# Altium PCB 20K Control Board V1.1.PcbDoc (part 21 of 24)
Units mm, origin at the board's own origin, x right, y up, seen from the top; angles counter-clockwise.
Board outline 132 x 260 mm, 4 copper layers (Top Layer, GND, VCC, Bottom Layer); 1384 components, 779 nets, 4515 pads, 1774 vias.
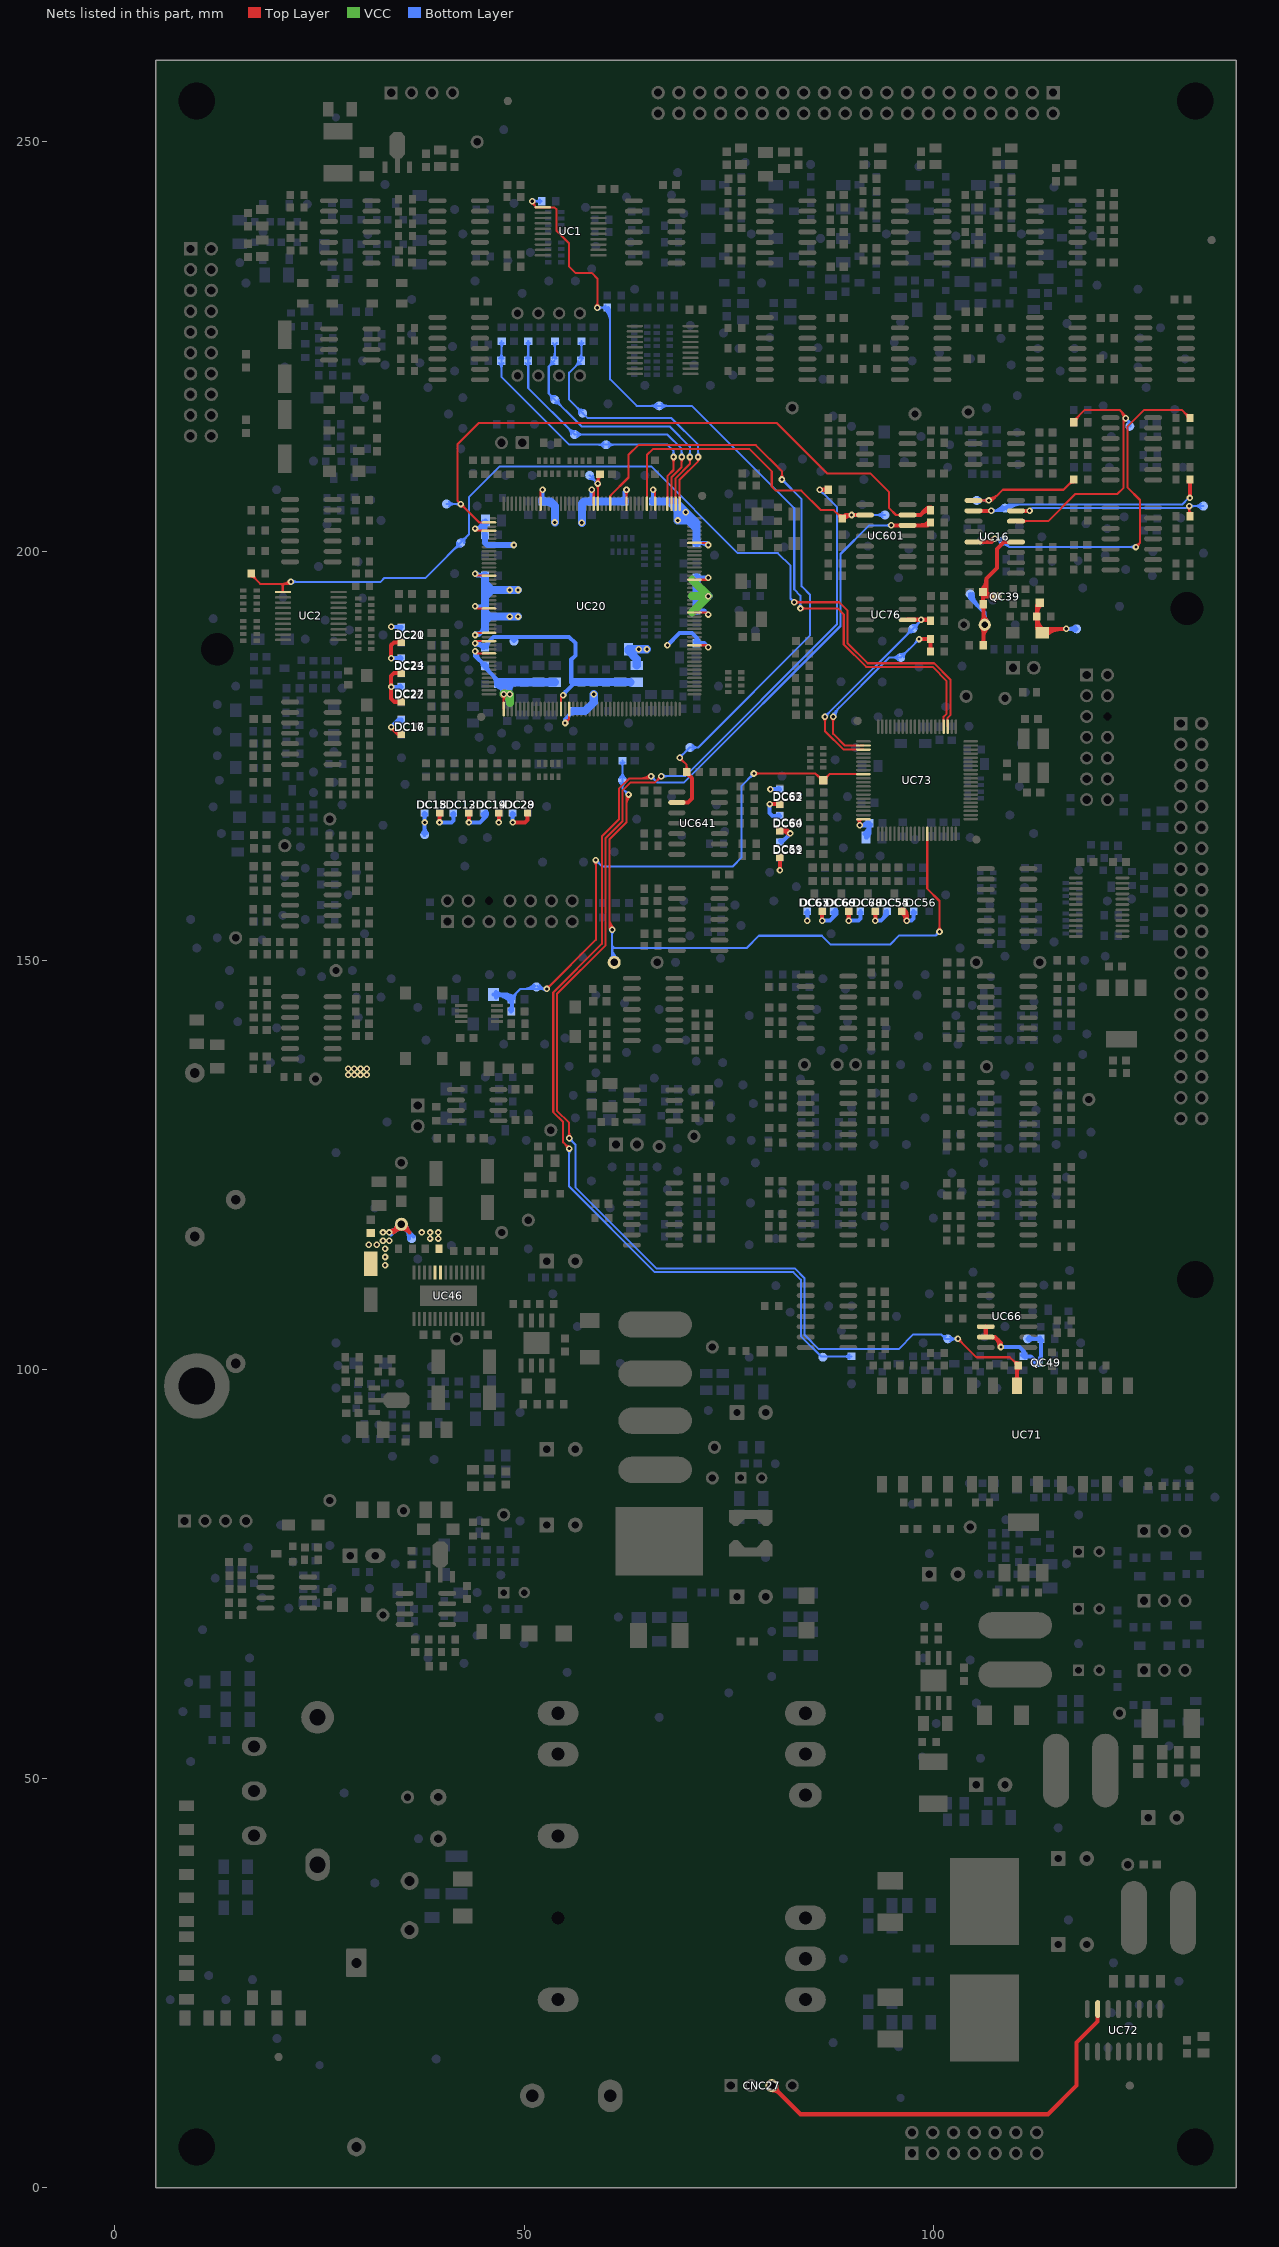
[diagram p23: the nets of this part, all layers, seen from the top]

## Via types
v1: diameter 0.8, hole 0.4, Top Layer to Bottom Layer, tented both sides, 1354 vias
v2: diameter 1.2, hole 0.7, Top Layer to Bottom Layer, 261 vias
v3: diameter 0.8, hole 0.4, Top Layer to Bottom Layer, 58 vias
v4: diameter 1.2, hole 0.7, Top Layer to Bottom Layer, tented top, 58 vias
v5: diameter 0.8, hole 0.4, Top Layer to Bottom Layer, tented top, 22 vias
v6: diameter 1.2, hole 0.7, Top Layer to Bottom Layer, tented both sides, 13 vias
v7: diameter 1.2, hole 0.7, Top Layer to Bottom Layer, tented bottom, 8 vias

## Nets (pads, with @x,y where several pads share a name; then routed paths per layer and width w, separated by ;. In a path a pad name is that pad's centre, name@x,y a point inside that pad or via, vN(x,y) a via of type N, cw(c..) or ccw(c..) an arc to the next point about the centre after c; other vN are vias at no path point) (continued)
S.X\R\S\: CC169.2 CC439.1 DC26.1 pad.ICT@51.5,146.75 RC269.1 UC73.9 | length 92.5
  Top Layer w0.25: v1(52.75,146.5) 58.75,152.5 v1(58.75,162.25) ; v1@52.75,146.775 ccw(c52.75,147.439) 53.219,146.969 ccw(c53.689,146.5) v1@53.025,146.5 ; v1@58.556,162.056 cw(c58.086,161.586) 58.75,161.586 cw(c59.414,161.586) v1@58.944,162.056 ; v1(78.075,172.825) 85.585,172.825 86.41,172 CC439.1@86.55,172 87.3,172.75 UC73.9@91.45,172.75 ; v1@78.269,172.631 cw(c78.739,172.161) 78.739,172.825 cw(c78.739,173.489) v1@78.269,173.019 ; 85.67,172.739 ccw(c86.55,173.619) 86.55,172.375 ccw(c86.55,173.28) 87.19,172.64 ccw(c87.83,172) CC439.1@86.925,172 ; 86.009,172.401 cw(c85.609,172) CC439.1@86.175,172 ; CC439.1@86.097,172.313 ccw(c86.55,172.766) CC439.1@86.55,172.125
  Bottom Layer w0.25: CC169.2@48.45,145.625 ccw(c48.45,146.047) CC169.2@48.749,145.749 ; CC169.2@48.5,145.25 48.5,145.5 49.5,146.5 v1(52.75,146.5) cw(c52.75,147.57) pad.ICT@51.855,146.983 ; CC169.2@48.575,145.25 cw(c49.36,145.25) 48.805,145.805 ; CC169.2@48.825,145.25 cw(c50.213,145.25) 49.232,146.232 ; 49.87,146.5 ccw(c49.87,148.38) pad.ICT@51.199,147.051 ; 50.474,146.5 ccw(c50.474,147.776) pad.ICT@51.376,146.874 ; pad.ICT@51.646,146.846 ccw(c52.287,147.266) 52.287,146.5 ; v1@52.556,146.306 ccw(c52.086,145.836) 52.086,146.5 ccw(c52.086,147.164) v1@52.556,146.694 ; v1@58.75,161.975 cw(c58.75,161.311) 59.219,161.781 cw(c59.689,162.25) v1@59.025,162.25 ; v1(58.75,162.25) 59.55,161.45 75.45,161.45 76.575,162.575 76.575,171.325 v1(78.075,172.825) ; v1@77.8,172.825 cw(c77.136,172.825) 77.606,172.356 cw(c78.075,171.886) v1@78.075,172.55
  Bottom Layer w0.5: DC26.1@46.25,145.8 47.9,145.8 48.5,145.2 RC269.1@48.5,143.85 ; DC26.1@46.519,145.8 cw(c46.519,143.319) 48.273,145.073 cw(c47.726,144.526) 48.5,144.526 ; DC26.1@46.568,145.482 cw(c47.336,144.714) 47.336,145.8 cw(c47.336,146.886) DC26.1@46.568,146.118 ; 47.726,145.8 cw(c47.726,144.526) CC169.2@48.627,145.427 ; RC269.1@48.259,143.941 ccw(c47.676,144.524) 48.5,144.524 ; RC269.1@48.4,143.75 RC269.1@48.4,143.85
S_BOOST_OFF: pad.ICT@42.25,201 RC296.1 UC2.1 UC73.63 | length 128
  Top Layer w0.25: RC296.1@16.65,196.875 cw(c16.65,196.332) 17.034,196.716 ; RC296.1@16.65,197.25 16.65,197.1 17.75,196 20.5,196 ; RC296.1@16.975,197.2 ccw(c18.001,197.2) 17.276,196.474 ; UC2.1@19.75,195 UC2.1@21,195 ; 20.25,196 20.5,195.75 ; UC2.1@20.5,195.033 20.5,195.75 ; 20.75,196 20.5,195.75 ; 20.976,196 ccw(c20.976,196.611) v1@21.479,196.264 ; v1@21.274,196.406 cw(c20.5,196.94) 20.5,196 ; v1(21.5,196.25) 21.25,196 20.5,196 ; v1(83,193.75) 88.5,193.75 89.5,192.75 89.5,188.773 91.973,186.3 100.086,186.3 102.077,184.309 102.077,179.964 101.75,179.636 UC73.63@101.75,178.55 ; v1@83.194,193.556 cw(c83.664,193.086) 83.664,193.75 cw(c83.664,194.414) v1@83.194,193.944 ; 20.5,195.75 20.5,196
  Bottom Layer w0.25: v1(21.5,196.25) 32.452,196.25 32.933,196.731 37.956,196.731 43.25,202.025 43.25,206.6 47,210.35 65.514,210.35 76.114,199.75 81,199.75 82.55,198.2 82.55,194.2 ; v1@21.694,196.056 cw(c22.164,195.586) 22.164,196.25 cw(c22.164,196.914) v1@21.694,196.444 ; 41.481,200.257 cw(c42.25,199.488) pad.ICT@42.25,200.575 ; 41.542,200.318 ccw(c40.86,201) pad.ICT@41.825,201 ; pad.ICT@42.25,201.425 ccw(c42.25,202.39) 42.932,201.708 ; pad.ICT@42.675,201 cw(c43.762,201) 42.993,201.769 ; v1@82.725,193.758 ccw(c82.127,193.777) 82.55,194.2 ; v1@82.992,194.025 cw(c82.973,194.623) 82.55,194.2 ; v1(83,193.75) 82.55,194.2
S_INV_OFF: pad.ICT@66.5,217.75 RC290.1 RC314.2 UC1.1 UC73.64 | length 115.9
  Top Layer w0.25: v1(51,242.75) 51,242.5 51.496,242.004 UC1.1@52.279,242.004 53.696,242.004 53.95,241.75 53.95,239.138 55.5,237.588 55.5,234.75 56.25,234 58.25,234 58.94,233.31 v1(58.94,229.75) ; v1@51.257,242.653 ccw(c51.721,242.479) UC1.1@51.371,242.129 ; 51.339,242.161 cw(c51.182,242.004) UC1.1@51.404,242.004 ; v1@58.746,229.944 ccw(c58.276,230.414) 58.94,230.414 ccw(c59.604,230.414) v1@59.134,229.944 ; v1(83.75,193) 88.3,193 89.05,192.25 89.05,188.586 91.786,185.85 99.9,185.85 101.627,184.123 101.627,180.15 101.25,179.773 UC73.64@101.25,178.55 ; v1@83.944,192.806 cw(c84.414,192.336) 84.414,193 cw(c84.414,193.664) v1@83.944,193.194
  Bottom Layer w0.25: v1(51,242.75) RC290.1@52.121,242.75 ; v1@51.194,242.556 cw(c51.664,242.086) 51.664,242.75 cw(c51.664,243.414) v1@51.194,242.944 ; RC290.1@51.92,242.52 ccw(c51.365,241.965) 51.365,242.75 ccw(c51.365,243.535) RC290.1@51.92,242.98 ; v1(58.94,229.75) RC314.2@60.15,229.75 60.5,229.4 60.5,221 63.75,217.75 70.5,217.75 83,205.25 83,195.318 83.75,194.568 v1(83.75,193) ; v1@59.134,229.556 cw(c59.604,229.086) 59.604,229.75 cw(c59.604,230.414) v1@59.134,229.944 ; RC314.2@59.92,229.47 cw(c58.52,228.07) 60.5,228.07 ; RC314.2@59.92,229.52 ccw(c59.365,228.965) 59.365,229.75 ccw(c59.365,230.535) RC314.2@59.92,229.98 ; RC314.2@60.097,229.647 cw(c59.124,228.674) 60.5,228.674 ; RC314.2@60.274,229.824 cw(c59.728,229.278) RC314.2@60.5,229.278 ; pad.ICT@66.199,217.449 ccw(c65.474,216.724) 65.474,217.75 ccw(c65.474,218.776) pad.ICT@66.199,218.051 ; pad.ICT@66.801,217.449 cw(c67.526,216.724) 67.526,217.75 cw(c67.526,218.776) pad.ICT@66.801,218.051 ; v1@83.556,193.194 ccw(c83.086,193.664) 83.75,193.664 ccw(c84.414,193.664) v1@83.944,193.194
SCI_RX-FROM-PC: pad.ICT@101.75,103.75 RC233.1 RC649.1 UC71.4 | length 190.7
  Top Layer w0.25: v1@55.306,128.444 ccw(c54.836,128.914) 55.5,128.914 ccw(c56.164,128.914) v1@55.694,128.444 ; v1(55.5,128.25) 55.5,130.136 54,131.636 54,145.886 59.95,151.836 59.95,164.947 62.025,167.022 62.025,170.775 63,171.75 66,171.75 v1(66.75,172.5) ; v1@66.475,172.5 cw(c65.811,172.5) 66.281,172.031 cw(c66.75,171.561) v1@66.75,172.225 ; v1@103,103.475 cw(c103,102.811) 103.469,103.281 cw(c103.939,103.75) v1@103.275,103.75 ; v1(103,103.75) 105.25,101.5 109.35,101.5 RC649.1@110.35,100.5 ; 109.71,101.14 ccw(c110.35,101.78) RC649.1@110.35,100.875 ; 109.831,101.019 cw(c109.361,100.55) RC649.1@110.025,100.55
  Top Layer w0.5: v1(86.1,207.5) RC233.1@87.15,207.5 RC233.1@87.25,207.5 ; RC233.1@87.009,207.359 ccw(c86.667,207.017) 86.667,207.5 ccw(c86.667,207.983) RC233.1@87.009,207.641 ; UC71.4@109.983,98.647 ccw(c109.385,99.245) 110.23,99.245 ccw(c111.075,99.245) UC71.4@110.477,98.647 ; UC71.4@110.23,98 RC649.1@110.23,100.5 ; 110.23,99.677 cw(c111.123,99.677) RC649.1@110.491,100.309
  Bottom Layer w0.25: v1@55.5,127.975 cw(c55.5,127.311) 55.969,127.781 cw(c56.439,128.25) v1@55.775,128.25 ; v1(55.5,128.25) 56.25,127.5 56.25,122.25 66.15,112.35 83.075,112.35 84.25,111.175 84.25,104.25 86,102.5 95.75,102.5 97.55,104.3 100.95,104.3 101.5,103.75 v1(103,103.75) ; v1(66.75,172.5) 69.662,172.5 88.2,191.038 88.2,205.4 v1(86.1,207.5) ; v1@66.944,172.306 cw(c67.414,171.836) 67.414,172.5 cw(c67.414,173.164) v1@66.944,172.694 ; v1@86.1,207.225 cw(c86.1,206.561) 86.569,207.031 cw(c87.039,207.5) v1@86.375,207.5 ; 101.075,104.175 ccw(c101.343,104.443) pad.ICT@101.535,104.116 ; 101.201,104.049 cw(c100.903,103.75) pad.ICT@101.325,103.75 ; pad.ICT@102.051,103.449 cw(c102.776,102.724) 102.776,103.75 cw(c102.776,104.776) pad.ICT@102.051,104.051 ; v1@102.806,103.556 ccw(c102.336,103.086) 102.336,103.75 ccw(c102.336,104.414) v1@102.806,103.944
SCI_RX-PC: pad.ICT@94.085,204.415 RC232.2 UC20.141 UC601.2 | length 47
  Top Layer w0.25: UC20.141@65,205.8 65,211.75 65.75,212.5 77.5,212.5 80.25,209.75 80.25,207.9 80.75,207.4 83.873,207.4 86.273,205 87.85,205 RC232.2@88.85,204 ; 88.21,204.64 ccw(c88.85,205.28) RC232.2@88.85,204.375 ; 88.331,204.519 cw(c87.861,204.05) RC232.2@88.525,204.05
  Top Layer w0.5: RC232.2@88.85,204 89.265,204.415 UC601.2@91.65,204.415 ; RC232.2@88.991,203.909 cw(c90.214,202.686) v1@90.214,204.415
  Bottom Layer w0.25: v1(90,204.415) pad.ICT@94.085,204.415 ; v1@90.194,204.221 cw(c90.664,203.751) 90.664,204.415 cw(c90.664,205.079) v1@90.194,204.609 ; pad.ICT@93.784,204.114 ccw(c93.059,203.389) 93.059,204.415 ccw(c93.059,205.441) pad.ICT@93.784,204.716
SCI_TX-PC: pad.ICT@40.5,205.75 RC226.2 UC20.2 UC601.13 | length 86
  Top Layer w0.25: v1@42.25,205.475 cw(c42.25,204.811) 42.719,205.281 cw(c43.189,205.75) v1@42.525,205.75 ; UC20.2@45.7,203.5 44.5,203.5 41.85,206.15 41.85,213.052 44.448,215.65 80.85,215.65 87,209.5 92.273,209.5 94.6,207.173 94.6,205.25 95.435,204.415 UC601.13@96.85,204.415 ; UC601.13@95.926,204.291 ccw(c95.628,203.993) 95.628,204.415 ccw(c95.628,204.837) UC601.13@95.926,204.539
  Top Layer w0.5: UC601.13@96.85,204.415 98.415,204.415 99,205 RC226.2@99.65,205 ; 98.675,204.675 cw(c99.22,204.13) RC226.2@99.561,204.821 ; 98.967,204.967 cw(c99.65,204.284) RC226.2@99.65,205.25 ; 99.168,205.168 cw(c99.546,204.79) RC226.2@99.783,205.269 ; RC226.2@99.509,204.859 ccw(c99.167,204.517) 99.167,205 ccw(c99.167,205.483) RC226.2@99.509,205.141
  Bottom Layer w0.25: pad.ICT@40.5,205.75 v1(42.25,205.75) ; pad.ICT@40.801,205.449 cw(c41.526,204.724) 41.526,205.75 cw(c41.526,206.776) pad.ICT@40.801,206.051 ; v1@42.056,205.556 ccw(c41.586,205.086) 41.586,205.75 ccw(c41.586,206.414) v1@42.056,205.944
SCI_TX-TO-PC: pad.ICT@86.5,101.5 RC223.2 RC642.2 UC601.12 | length 166
  Top Layer w0.25: v1@55.225,127 ccw(c54.561,127) 55.031,127.469 ccw(c55.5,127.939) v1@55.5,127.275 ; v1(55.5,127) 54.75,127.75 54.75,130.25 53.55,131.45 53.55,146.073 59.5,152.023 59.5,165.133 61.575,167.208 61.575,170.961 62.814,172.2 65.2,172.2 v1(65.5,172.5) ; 64.112,172.2 ccw(c64.112,173.888) v1@65.306,172.694 ; 64.715,172.2 ccw(c64.715,173.285) v1@65.482,172.518
  Top Layer w0.5: v1(94.855,203.145) UC601.12@96.85,203.145 99.295,203.145 RC223.2@99.65,203.5 ; 98.431,203.145 ccw(c98.431,204.669) RC223.2@99.509,203.591
  Bottom Layer w0.25: v1@55.306,126.806 cw(c54.836,126.336) 55.5,126.336 cw(c56.164,126.336) v1@55.694,126.806 ; v1(55.5,127) 55.5,122.364 65.964,111.9 82.889,111.9 83.8,110.989 83.8,104.064 86.264,101.6 RC642.2@90,101.6 ; v1@65.5,172.225 cw(c65.5,171.561) 65.969,172.031 cw(c66.439,172.5) v1@65.775,172.5 ; v1(65.5,172.5) 66.25,171.75 69.548,171.75 88.65,190.852 88.65,199.65 92.145,203.145 v1(94.855,203.145) ; RC642.2@89.72,101.37 ccw(c89.165,100.815) 89.165,101.6 ccw(c89.165,102.385) RC642.2@89.72,101.83 ; v1@94.661,202.951 ccw(c94.191,202.481) 94.191,203.145 ccw(c94.191,203.809) v1@94.661,203.339
SCLA: pad.ICT@97.491,190.517 RC699.2 UC73.3 UC76.6 | length 33.7
  Top Layer w0.25: v1@86.556,179.556 cw(c86.086,179.086) 86.75,179.086 cw(c87.414,179.086) v1@86.944,179.556 ; v1(86.75,179.75) 86.75,178.025 89.025,175.75 UC73.3@91.45,175.75
  Top Layer w0.5: UC76.6@96.85,191.615 v1(98.5,191.615) RC699.2@99.535,191.615 ; 99.01,191.615 cw(c99.01,190.91) RC699.2@99.509,191.409
  Bottom Layer w0.25: v1(86.75,179.75) 86.75,179.775 98.5,191.525 v1(98.5,191.615) ; v1@86.75,180.025 ccw(c86.75,180.628) 87.176,180.202 ; v1@87.025,179.75 cw(c87.75,179.75) 87.237,180.263 ; pad.ICT@97.066,190.517 cw(c96.04,190.517) 96.766,189.791 cw(c97.491,189.066) pad.ICT@97.491,190.092 ; pad.ICT@97.491,190.942 ccw(c97.491,191.968) 98.217,191.242 ccw(c98.942,190.517) pad.ICT@97.916,190.517 ; 97.967,190.992 ccw(c97.345,191.615) v1@98.225,191.615 ; 98.184,191.209 cw(c98.5,190.893) v1@98.5,191.34
SCPUTOMCPU: pad.ICT@58,209.25 RC665.1 UC20.153 | length 11.7
  Top Layer w0.25: v1@58.806,208.056 cw(c58.336,207.586) 59,207.586 cw(c59.664,207.586) v1@59.194,208.056 ; v1@58.806,208.444 ccw(c58.336,208.914) 59,208.914 ccw(c59.664,208.914) v1@59.194,208.444 ; UC20.153@59,205.8 v1(59,208.25) 59,209 59.4,209.4 RC665.1@59.5,209.4 ; v1@59,208.233 cw(c60.235,208.233) RC665.1@59.416,209.157 ; 59,208.789 cw(c59.742,208.789) RC665.1@59.25,209.344
  Bottom Layer w0.25: pad.ICT@58,208.825 cw(c58,207.799) 58.726,208.524 cw(c59.451,209.25) pad.ICT@58.425,209.25 ; pad.ICT@58,209.25 v1(59,208.25) ; v1@58.725,208.25 ccw(c58.061,208.25) 58.531,208.719 ccw(c59,209.189) v1@59,208.525
SDAA: pad.ICT@96,187 RC700.1 RC702.2 UC73.2 | length 33.6
  Top Layer w0.25: v1@87.556,179.556 cw(c87.086,179.086) 87.75,179.086 cw(c88.414,179.086) v1@87.944,179.556 ; v1(87.75,179.75) 87.75,177.662 89.162,176.25 UC73.2@91.45,176.25
  Top Layer w0.5: v1(98.25,189.25) RC702.2@99.65,189.25 RC700.1@99.65,187.75 ; RC700.1@99.509,187.941 ccw(c99.167,188.283) 99.65,188.283 ccw(c100.133,188.283) RC700.1@99.791,187.941 ; RC702.2@99.509,189.059 cw(c99.167,188.717) 99.65,188.717 cw(c100.133,188.717) RC702.2@99.791,189.059 ; RC702.2@99.509,189.109 ccw(c99.167,188.767) 99.167,189.25 ccw(c99.167,189.733) RC702.2@99.509,189.391
  Bottom Layer w0.25: v1(87.75,179.75) 87.75,180.139 94.611,187 pad.ICT@96,187 v1(98.25,189.25) ; v1@87.775,179.75 cw(c88.774,179.75) 88.068,180.457 ; v1@88.025,179.75 cw(c89.628,179.75) 88.494,180.883 ; pad.ICT@95.699,186.699 ccw(c94.974,185.974) 94.974,187 ccw(c94.974,188.026) pad.ICT@95.699,187.301 ; pad.ICT@96,187.425 ccw(c96,188.451) 96.726,187.726 ccw(c97.451,187) pad.ICT@96.425,187 ; v1@97.975,189.25 cw(c97.311,189.25) 97.781,188.781 cw(c98.25,188.311) v1@98.25,188.975
SDSP_OK: pad.ICT@70.25,176 RC272.2 UC20.150 UC641.2 | length 86.6
  Top Layer w0.25: UC20.150@60.5,205.8 60.5,206.75 62.751,209.001 62.751,211.751 63.95,212.95 78.3,212.95 81.5,209.75 v1(81.5,208.75) ; UC20.150@60.525,206.55 cw(c61.068,206.55) 60.684,206.934 ; v1@69,174.475 cw(c69,173.872) 69.426,174.298 ; v1(69,174.75) 69,174.725 69.85,173.875 RC272.2@69.85,173 ; v1@69.275,174.75 ccw(c70,174.75) 69.487,174.237 ; RC272.2@69.62,173.28 ccw(c69.065,173.835) 69.85,173.835 ccw(c70.635,173.835) RC272.2@70.08,173.28 ; v1@81.306,208.944 ccw(c80.836,209.414) 81.5,209.414 ccw(c82.164,209.414) v1@81.694,208.944
  Top Layer w0.5: UC641.2@68.65,169.29 70.04,169.29 70.5,169.75 70.5,172.25 69.85,172.9 RC272.2@69.85,173 ; RC272.2@70.05,172.95 ccw(c70.654,172.95) RC272.2@70.227,172.523
  Bottom Layer w0.25: v1(69,174.75) 69,174.775 70.225,176 71.253,176 ; v1@69,175.025 ccw(c69,175.628) 69.426,175.202 ; v1@69.275,174.75 cw(c70,174.75) 69.487,175.263 ; pad.ICT@70.555,175.704 cw(c71.252,175.03) 71.252,176 ; pad.ICT@70.555,176.296 ccw(c71.252,176.97) 71.252,176 ; v1@81.5,208.475 cw(c81.5,207.811) 81.969,208.281 cw(c82.439,208.75) v1@81.775,208.75 ; v1(81.5,208.75) 83.9,206.35 83.9,195.691 84.95,194.641 84.95,189.697 71.253,176
SSCI: pad.ICT@111.5,103.75 QC49.3 RC598.1 RC600.1 UC66.5 UC66.6 | length 23.6
  Top Layer w0.5: UC66.5@106.4,105.23 UC66.6@106.4,103.96 107.54,103.96 108.25,103.25 v1(108.25,102.75) ; UC66.6@107.2,103.91 cw(c107.2,102.968) 107.866,103.634 ; UC66.6@107.215,103.912 cw(c107.361,103.441) 107.71,103.79 ; 107.64,103.86 cw(c106.531,102.75) v1@108.1,102.75
  Bottom Layer w0.5: v1(108.25,102.75) 110.5,102.75 111,102.25 RC598.1@111,101.6 111.903,101.6 QC49.3@112.718,100.785 113.15,101.217 RC600.1@113.15,103.75 pad.ICT@111.5,103.75 ; RC598.1@110.859,101.741 ccw(c110.517,102.083) 111,102.083 ccw(c111.483,102.083) RC598.1@111.141,101.741 ; 110.977,102.273 cw(c110.319,101.614) RC598.1@111.25,101.593 ; RC598.1@111.191,101.459 cw(c111.533,101.117) 111.533,101.6 cw(c111.533,102.083) RC598.1@111.191,101.741 ; pad.ICT@111.712,103.538 cw(c112.224,103.026) 112.224,103.75 cw(c112.224,104.474) pad.ICT@111.712,103.962 ; 112.061,101.442 cw(c111.404,100.785) QC49.3@112.333,100.785 ; QC49.3@112.749,100.931 ccw(c111.782,101.899) 113.15,101.899 ; RC600.1@113.009,103.559 cw(c112.667,103.217) 113.15,103.217 cw(c113.633,103.217) RC600.1@113.291,103.559 ; RC600.1@113.009,103.609 ccw(c112.667,103.267) 112.667,103.75 ccw(c112.667,104.233) RC600.1@113.009,103.891
SW-DIP1: CC171.2 pad.ICT@57.157,216.843 RC281.2 UC20.133 | length 41.3
  Top Layer w0.25: UC20.133@69,205.8 69,208.75 71.25,211 ; v1@71.103,211.268 cw(c70.933,211) 71.25,211 ; v1(71.25,211.5) 71.25,211 ; v1@71.397,211.268 ccw(c71.567,211) 71.25,211
  Bottom Layer w0.25: CC171.2@56.575,223.25 cw(c55.67,223.25) 56.31,222.61 cw(c56.95,221.97) CC171.2@56.95,222.875 ; CC171.2@56.685,223.515 ccw(c55.924,224.276) 57,224.276 ; pad.ICT@56.732,216.843 ccw(c55.706,216.843) 56.431,217.569 ccw(c57.157,218.294) pad.ICT@57.157,217.268 ; RC281.2@56.77,225.42 cw(c56.215,224.865) 57,224.865 cw(c57.785,224.865) RC281.2@57.23,225.42 ; 57,224.035 ccw(c57.735,224.035) CC171.2@57.215,223.515 ; RC281.2@57,225.65 57,223.3 CC171.2@56.95,223.25 55.5,221.8 55.5,218.5 pad.ICT@57.157,216.843 57.75,216.25 68,216.25 71.25,213 v1(71.25,211.5) ; v1@71.056,211.694 ccw(c70.586,212.164) 71.25,212.164 ccw(c71.914,212.164) v1@71.444,211.694
SW-DIP2: CC172.2 pad.ICT@53.75,218.5 RC282.2 UC20.134 | length 42.9
  Top Layer w0.254: UC20.134@68.5,205.8 68.5,208.889 70.25,210.639 v1(70.25,211.5) ; v1@70.057,211.307 cw(c69.591,210.841) 70.25,210.841 cw(c70.909,210.841) v1@70.443,211.307
  Bottom Layer w0.254: pad.ICT@53.327,218.5 ccw(c52.306,218.5) 53.028,219.222 ccw(c53.75,219.944) pad.ICT@53.75,218.923 ; CC172.2@53.327,223.25 cw(c52.427,223.25) 53.063,222.613 cw(c53.7,221.977) CC172.2@53.7,222.877 ; CC172.2@53.436,223.514 ccw(c52.679,224.271) 53.75,224.271 ; RC282.2@53.522,225.422 cw(c52.97,224.87) 53.75,224.87 cw(c54.53,224.87) RC282.2@53.978,225.422 ; CC172.2@53.7,223.25 53,222.55 53,219.25 57,215.25 67.75,215.25 70.25,212.75 v1(70.25,211.5) ; pad.ICT@53.75,218.077 cw(c53.75,217.056) 54.472,217.778 cw(c55.194,218.5) pad.ICT@54.173,218.5 ; CC172.2@53.75,223.5 53.75,225.15 ; 53.75,224.03 ccw(c54.48,224.03) CC172.2@53.964,223.514 ; v1@70.057,211.693 ccw(c69.591,212.159) 70.25,212.159 ccw(c70.909,212.159) v1@70.443,211.693
SW-DIP3: CC173.2 pad.ICT@56.159,214.25 RC285.2 UC20.135 | length 44.2
  Top Layer w0.25: UC20.135@68,205.8 68,209.028 69.25,210.278 v1(69.25,211.5) ; v1@69.056,211.306 cw(c68.586,210.836) 69.25,210.836 cw(c69.914,210.836) v1@69.444,211.306
  Bottom Layer w0.25: CC173.2@50.185,222.985 cw(c49.424,222.224) 50.5,222.224 ; CC173.2@50.185,223.515 ccw(c49.424,224.276) 50.5,224.276 ; RC285.2@50.27,225.42 cw(c49.715,224.865) 50.5,224.865 cw(c51.285,224.865) RC285.2@50.73,225.42 ; 50.5,222.465 cw(c51.235,222.465) CC173.2@50.715,222.985 ; 50.5,224.035 ccw(c51.235,224.035) CC173.2@50.715,223.515 ; RC285.2@50.5,225.65 50.5,219.909 pad.ICT@56.159,214.25 67.5,214.25 69.25,212.5 v1(69.25,211.5) ; pad.ICT@55.734,214.25 ccw(c54.708,214.25) 55.434,214.976 ccw(c56.159,215.701) pad.ICT@56.159,214.675 ; pad.ICT@56.46,213.949 cw(c57.185,213.224) 57.185,214.25 cw(c57.185,215.276) pad.ICT@56.46,214.551 ; v1@69.056,211.694 ccw(c68.586,212.164) 69.25,212.164 ccw(c69.914,212.164) v1@69.444,211.694
SW-DIP4: CC174.2 pad.ICT@60,213 RC286.2 UC20.136 | length 45.3
  Top Layer w0.25: UC20.136@67.5,205.8 67.5,209.165 68.25,209.915 v1(68.25,211.5) ; v1@68.056,211.306 cw(c67.586,210.836) 68.25,210.836 cw(c68.914,210.836) v1@68.444,211.306
  Bottom Layer w0.25: CC174.2@46.935,222.985 cw(c46.174,222.224) 47.25,222.224 ; CC174.2@46.935,223.515 ccw(c46.174,224.276) 47.25,224.276 ; RC286.2@47.02,225.42 cw(c46.465,224.865) 47.25,224.865 cw(c48.035,224.865) RC286.2@47.48,225.42 ; 47.25,222.465 cw(c47.985,222.465) CC174.2@47.465,222.985 ; 47.25,224.035 ccw(c47.985,224.035) CC174.2@47.465,223.515 ; RC286.2@47.25,225.65 47.25,221.25 55.5,213 pad.ICT@60,213 67.5,213 68.25,212.25 v1(68.25,211.5) ; pad.ICT@59.699,212.699 ccw(c58.974,211.974) 58.974,213 ccw(c58.974,214.026) pad.ICT@59.699,213.301 ; pad.ICT@60.301,212.699 cw(c61.026,211.974) 61.026,213 cw(c61.026,214.026) pad.ICT@60.301,213.301 ; v1@68.056,211.694 ccw(c67.586,212.164) 68.25,212.164 ccw(c68.914,212.164) v1@68.444,211.694
"SYN AD WITH MCPU": pad.ICT@62,172 RC257.1 TP68.1 UC73.33 | length 98.7
  Top Layer w0.25: 60.4,154.052 ccw(c61.052,154.052) v1@60.591,153.591 ; 60.4,154.655 ccw(c61.655,154.655) v1@60.768,153.768 ; 60.4,155.259 ccw(c62.259,155.259) v1@60.944,153.944 ; v1(60.75,153.75) 60.4,154.1 60.4,164.761 62.5,166.861 62.5,170 v1(62.75,170.25) ; 62.5,168.983 cw(c64.017,168.983) v1@62.944,170.056 ; 62.5,169.586 cw(c63.414,169.586) v1@62.768,170.232 ; UC73.33@99.25,165.45 99.25,158.75 100.75,157.25 v1(100.75,153.5) ; v1@100.556,153.694 ccw(c100.086,154.164) 100.75,154.164 ccw(c101.414,154.164) v1@100.944,153.694
  Bottom Layer w0.25: TP68.1@60.523,150.227 ccw(c59.974,150.776) 60.75,150.776 ; v1@60.556,153.556 cw(c60.086,153.086) 60.75,153.086 cw(c61.414,153.086) v1@60.944,153.556 ; 60.75,150.554 ccw(c61.548,150.554) TP68.1@61.099,149.895 ; 60.75,151.027 ccw(c61.87,151.027) TP68.1@61.239,150.101 ; 60.75,151.75 61,151.5 ; v1(60.75,153.75) 60.75,151.5 ; TP68.1@61,149.75 60.75,150 60.75,151.5 ; TP68.1@61.38,150.308 cw(c62.193,151.5) 60.75,151.5 ; pad.ICT@61.699,172.301 ccw(c60.974,173.026) 62,173.026 ccw(c63.026,173.026) pad.ICT@62.301,172.301 ; pad.ICT@61.705,171.694 cw(c61.036,171) 62,171 ; RC257.1@61.77,174.17 cw(c61.215,173.615) 62,173.615 cw(c62.785,173.615) RC257.1@62.23,174.17 ; RC257.1@62,174.4 62,171 ; pad.ICT@62.295,171.694 ccw(c62.964,171) 62,171 ; v1@62.475,170.25 ccw(c61.811,170.25) 62.281,170.719 ccw(c62.75,171.189) v1@62.75,170.525 ; v1@62.625,170.125 v1@62.75,170 ; v1(62.75,170.25) 62,171 ; 97,153.05 97.25,153.05 ; v1@100.475,153.492 cw(c99.877,153.473) 100.3,153.05 ; v1@100.725,153.225 v1@100.875,153.375 ; v1@100.742,153.225 ccw(c100.723,152.627) 100.3,153.05 ; v1(100.75,153.5) 100.3,153.05 ; 60.75,151.5 61,151.5 ; 61,151.5 77.182,151.5 78.682,153 86.364,153 87.439,151.925 94.7,151.925 95.825,153.05 97.25,153.05 ; 97.25,153.05 100.3,153.05
TEMPAMB: CC271.1 NTCC1.1 pad.ICT@104.5,194.75 QC39.3 RC455.2 RC465.1 UC16.12 | length 37.6
  Top Layer w0.5: CC271.1@105.857,194.841 ccw(c106.655,195.501) 106.655,194.465 ; CC271.1@105.873,194.823 cw(c105.446,194.396) 106.05,194.396 cw(c106.654,194.396) 106.227,194.823 ccw(c105.644,195.406) CC271.1@106.468,195.406 ; CC271.1@105.873,195.177 ccw(c104.437,196.613) 106.468,196.613 ; CC271.1@105.89,194.808 cw(c105.603,194.465) 106.05,194.465 ; NTCC1.1@105.916,190.646 cw(c105.473,190.203) 106.1,190.203 ; NTCC1.1@105.916,191.354 ccw(c105.473,191.797) 106.1,191.797 ; RC465.1@105.959,188.691 ccw(c105.617,189.033) 106.1,189.033 ccw(c106.583,189.033) RC465.1@106.241,188.691 ; RC455.2@105.959,193.309 cw(c105.617,192.967) 106.1,192.967 cw(c106.583,192.967) RC455.2@106.241,193.309 ; RC455.2@106.05,193.55 106.05,194.465 ; 106.05,194.154 ccw(c106.704,194.154) RC455.2@106.241,193.691 ; 106.085,194.465 QC39.3@107.718,194.465 cw(c107.718,196.38) CC271.1@106.243,195.159 ; RC465.1@106.1,188.5 RC455.2@106.1,193.5 ; 106.1,189.382 cw(c107.888,189.382) NTCC1.1@106.624,190.646 ; 106.1,192.618 ccw(c107.888,192.618) NTCC1.1@106.624,191.354 ; CC271.1@106.21,194.808 ccw(c106.497,194.465) 106.05,194.465 ; 106.468,194.465 106.468,196.668 107.75,197.95 107.75,200.25 108.615,201.115 UC16.12@110.1,201.115 ; QC39.3@107.394,194.319 ccw(c107.04,193.965) 107.04,194.465 ccw(c107.04,194.965) QC39.3@107.394,194.612
  Bottom Layer w0.5: pad.ICT@104.5,194.75 104.5,194.25 106.27,192.48 NTCC1.1@106.27,191 ; pad.ICT@104.8,194.75 ccw(c106.731,194.75) 105.366,193.384 ; NTCC1.1@105.916,191.354 ccw(c105.063,192.207) 106.27,192.207 ccw(c107.477,192.207) NTCC1.1@106.624,191.354
TEMPBOOST1: pad.ICT@133,205.5 RC447.1 UC16.15 | length 29.4
  Top Layer w0.25: v1@131.056,205.306 cw(c130.586,204.836) 131.25,204.836 cw(c131.914,204.836) v1@131.444,205.306 ; RC447.1@131.12,204.53 ccw(c130.807,204.843) 131.25,204.843 ; v1@131.25,205.326 ccw(c132.376,205.326) RC447.1@131.58,204.53 ; v1(131.25,205.5) 131.25,204.35 RC447.1@131.35,204.25
  Top Layer w0.5: UC16.15@110.1,204.925 v1(111.75,204.925)
  Bottom Layer w0.25: v1(111.75,204.925) 112.075,205.25 131,205.25 v1(131.25,205.5) pad.ICT@133,205.5 ; v1@131.444,205.306 cw(c131.914,204.836) 131.914,205.5 cw(c131.914,206.164) v1@131.444,205.694 ; pad.ICT@132.699,205.199 ccw(c131.974,204.474) 131.974,205.5 ccw(c131.974,206.526) pad.ICT@132.699,205.801
TEMPBOOST2: pad.ICT@124,215.25 RC470.1 UC16.14 | length 40.3
  Top Layer w0.25: UC16.14@110.1,203.655 114.019,203.655 117.364,207 122.5,207 123.25,207.75 123.25,216.75 122.75,217.25 ; UC16.14@111.024,203.531 cw(c111.322,203.233) 111.322,203.655 cw(c111.322,204.077) UC16.14@111.024,203.779 ; RC470.1@117.15,215.5 117.15,215.9 118.5,217.25 122.75,217.25 ; RC470.1@117.15,216.125 ccw(c117.15,216.668) 117.534,216.284 ; RC470.1@117.475,215.8 cw(c118.501,215.8) 117.776,216.526 ; 122.854,217.146 cw(c121.958,216.25) v1@123.225,216.25 ; 123.25,215.75 123.5,216 123.5,216.5 122.75,217.25 ; 123.281,216.719 cw(c122.811,216.25) v1@123.475,216.25
  Bottom Layer w0.25: v1@123.5,215.975 cw(c123.5,215.311) 123.969,215.781 cw(c124.439,216.25) v1@123.775,216.25 ; v1(123.5,216.25) 124,215.75 pad.ICT@124,215.25 ; v1@123.571,216.179 cw(c122.891,215.499) pad.ICT@123.829,215.288 ; 123.892,215.858 cw(c123.416,215.381) pad.ICT@124.073,215.234
TEMPINVR: pad.ICT@105.305,206.195 RC478.1 UC16.1 | length 23.1
  Top Layer w0.25: UC16.1@104.9,206.195 107.195,206.195 ; UC16.1@105.824,206.071 cw(c106.122,205.773) 106.122,206.195 cw(c106.122,206.617) UC16.1@105.824,206.319 ; v1@106.556,206.001 ccw(c106.086,205.531) 106.086,206.195 ccw(c106.086,206.859) v1@106.556,206.389 ; v1@106.75,206.22 ccw(c106.75,207.355) 107.552,206.552 ; v1@106.75,206.47 ccw(c106.75,208.208) 107.979,206.979 ; v1@106.996,206.072 cw(c107.195,205.972) 107.195,206.195 ; v1@106.996,206.318 ccw(c107.195,206.418) 107.195,206.195 ; 116.51,208.11 cw(c117.15,207.47) RC478.1@117.15,208.375 ; 116.631,208.231 ccw(c116.161,208.7) RC478.1@116.825,208.7 ; RC478.1@117.15,208.75 115.9,207.5 108.5,207.5 107.195,206.195
  Bottom Layer w0.25: pad.ICT@105.305,206.195 v1(106.75,206.195) ; pad.ICT@105.606,205.894 cw(c106.331,205.169) 106.331,206.195 cw(c106.331,207.221) pad.ICT@105.606,206.496 ; v1@106.556,206.001 ccw(c106.086,205.531) 106.086,206.195 ccw(c106.086,206.859) v1@106.556,206.389
TEMPINVS: pad.ICT@108.75,205.25 RC487.1 UC16.2 | length 39.1
  Top Layer w0.5: UC16.2@104.9,204.925 v1(107.075,204.925) ; RC487.1@131.209,208.559 cw(c130.867,208.217) 131.35,208.217 cw(c131.833,208.217) RC487.1@131.491,208.559 ; v1(131.35,206.5) RC487.1@131.35,208.75
  Bottom Layer w0.25: v1@107.269,204.731 cw(c107.739,204.261) 107.739,204.925 cw(c107.739,205.589) v1@107.269,205.119 ; 107.633,204.925 ccw(c107.633,206.247) pad.ICT@108.619,205.367 ; 108.192,204.925 ccw(c108.192,205.748) pad.ICT@108.806,205.2 ; pad.ICT@108.433,205.533 cw(c107.075,206.745) v1(107.075,204.925) 108.425,204.925 109.2,205.7 130.425,205.7 131.225,206.5 v1(131.35,206.5) ; pad.ICT@108.697,205.303 cw(c109.655,204.345) 109.655,205.7 ; pad.ICT@108.874,205.126 cw(c110.259,203.741) 110.259,205.7 ; pad.ICT@109.051,204.949 cw(c110.862,203.138) 110.862,205.7
TEMPINVT: pad.ICT@108.5,201.25 RC496.1 UC16.5 | length 53.5
  Top Layer w0.25: v1(124.75,200.5) 125.25,201 125.25,206.25 123.7,207.8 123.7,215.2 125.75,217.25 130.35,217.25 RC496.1@131.35,216.25 ; v1@124.75,200.775 ccw(c124.75,201.439) 125.219,200.969 ccw(c125.689,200.5) v1@125.025,200.5 ; 130.71,216.89 ccw(c131.35,217.53) RC496.1@131.35,216.625 ; 130.831,216.769 cw(c130.361,216.3) RC496.1@131.025,216.3
  Top Layer w0.5: UC16.5@104.9,201.115 107.115,201.115 v1(107.5,201.5) ; 106.208,201.115 ccw(c106.208,202.792) v1@107.394,201.606
  Bottom Layer w0.25: v1@107.694,201.306 cw(c108.164,200.836) 108.164,201.5 cw(c108.164,202.164) v1@107.694,201.694 ; v1@107.87,201.5 cw(c107.87,200.996) pad.ICT@108.338,201.185 ; pad.ICT@108.106,201.091 ccw(c107.5,200.847) v1(107.5,201.5) 108.25,201.5 pad.ICT@108.5,201.25 109.25,200.5 v1(124.75,200.5) ; pad.ICT@108.5,200.825 cw(c108.5,199.799) 109.226,200.524 cw(c109.951,201.25) pad.ICT@108.925,201.25 ; v1@124.556,200.306 ccw(c124.086,199.836) 124.086,200.5 ccw(c124.086,201.164) v1@124.556,200.694
TH_CHOKE: CC273.1 pad.ICT@117.5,190.5 RC459.2 ZDC1.2 | length 19.1
  Top Layer w0.5: RC459.2@112.509,191.809 cw(c112.167,191.467) 112.65,191.467 cw(c113.133,191.467) RC459.2@112.791,191.809 ; RC459.2@112.509,192.191 ccw(c112.167,192.533) 112.65,192.533 ccw(c113.133,192.533) RC459.2@112.791,192.191 ; 112.65,191 ccw(c113.95,191) ZDC1.2@113.17,189.96 ; RC459.2@112.65,192.251 cw(c114.449,192.251) CC273.1@113.177,193.523 ; CC273.1@113,193.7 112.65,193.35 RC459.2@112.65,192 ; ZDC1.2@113.365,190.035 cw(c114.486,188.914) 114.486,190.5 ; ZDC1.2@113.47,190.36 cw(c114.7,192) RC459.2@112.65,192 ; ZDC1.2@113.718,189.682 cw(c115.693,187.707) 115.693,190.5 ; v1(116.25,190.5) 113.8,190.5 ZDC1.2@113.3,190 112.65,190.65 RC459.2@112.65,192
  Bottom Layer w0.5: v1(116.25,190.5) pad.ICT@117.5,190.5 ; pad.ICT@117.288,190.288 ccw(c116.776,189.776) 116.776,190.5 ccw(c116.776,191.224) pad.ICT@117.288,190.712
TX-TO-PC: CNC27.3 UC72.7 | length 52.7
  Top Layer w0.5: CNC27.3@80.25,11.95 cw(c80.25,10.622) 81.189,11.561 cw(c82.128,12.5) CNC27.3@80.8,12.5 ; CNC27.3@80.25,12.5 83.75,9 114,9 117.5,12.5 117.5,17.75 120.075,20.325 UC72.7@120.075,21.85
V19A: CC157.2 CC160.2 CC298.1 CC299.1 CC300.1 LC1.2 pad.ICT@48.75,189 UC20.31 UC20.59 | length 42.9
  Top Layer w0.25: v1(44,188.75) 44.25,189 UC20.31@45.7,189 ; UC20.59@54.5,180.7 54.5,182.15 v1(54.75,182.4)
  Bottom Layer w0.25: v1(44,188.75) v1@44.025,188.75 ; CC160.2@45,188.25 CC160.2@45.2,188.25
  Bottom Layer w0.5: v1@44,188.6 cw(c44,187.031) CC160.2@45.11,188.14 ; v1@44.066,188.615 cw(c44.327,188.077) CC160.2@44.75,188.5 ; 44.6,188.65 ccw(c45.013,189.063) CC160.2@45.144,188.494 ; CC160.2@44.973,188.145 ccw(c44.025,187.705) 44.025,188.75 44.5,188.75 CC160.2@45,188.25 ; CC160.2@45.2,188.25 45.2,188.436 46.264,189.5 53.25,189.5 ; CC160.2@45.45,188.25 cw(c46.504,188.25) 45.759,188.995 ; 48.25,189.5 pad.ICT@48.75,189 49.25,189.5 ; v1(54.75,182.4) 54.75,182.5 56.2,183.95 CC157.2@57,183.95 56.05,183.95 55.75,184.25 55.75,186.75 56.25,187.25 56.25,188.75 55.5,189.5 53.25,189.5 ; 54.75,189.5 53.25,189.5 ; v1@54.9,182.4 cw(c55.504,182.4) 55.077,182.827 ; 56.396,183.95 ccw(c56.396,184.554) 56.823,184.127 cw(c56.396,184.554) 56.396,183.95 ; 56.396,183.95 cw(c56.396,183.346) 56.823,183.773 ccw(c56.396,183.346) 56.396,183.95
  Bottom Layer w1: 56,184 63,183.984
V19D: CC107.1 CC110.1 CC111.1 CC112.1 CC113.1 CC114.1 CC115.1 CC116.1 CC117.1 CC118.1 CC119.1 CC120.1 CC121.1 CC122.1 CC291.1 CC309.2 EC2.1 LC1.1 pad.ICT@36.25,116 RC502.2 TP58.1 UC20.4 UC20.15 UC20.23 UC20.29 UC20.61 UC20.101 UC20.109 UC20.117 UC20.126 UC20.139 UC20.146 UC20.154 UC20.167 UC46.23 UC46.24 | length 166.7
  Top Layer w0.25: v1(44,193.25) 44.25,193 UC20.23@45.7,193 ; v1(44,197.25) 44.25,197 UC20.15@45.7,197 ; v1(44,202.75) 44.25,202.5 UC20.4@45.7,202.5 ; v1@44.25,190 UC20.29@45.7,190 ; UC20.167@52,205.8 52,207.25 v1(52.25,207.5) ; v1(55,179) 55.5,179.5 UC20.61@55.5,180.7 ; v1@55,179.275 ccw(c55,179.939) 55.469,179.469 ccw(c55.939,179) v1@55.275,179 ; v1(58.25,207.5) 58.5,207.25 UC20.154@58.5,205.8 ; v1@62.306,207.306 cw(c61.836,206.836) 62.5,206.836 cw(c63.164,206.836) v1@62.694,207.306 ; UC20.146@62.5,205.8 v1(62.5,207.5) ; v1(65.75,207.5) 66,207.25 UC20.139@66,205.8 ; UC20.101@70.8,188.5 72.25,188.5 v1(72.5,188.25) ; UC20.109@70.8,192.5 72.25,192.5 v1(72.5,192.25) ; UC20.117@70.8,196.5 72.25,196.5 v1(72.5,196.75) ; UC20.126@70.8,201 72.25,201 v1(72.5,200.75)
  Top Layer w0.5: v1@33.5,116.9 ccw(c33.5,118.469) TP58.1@34.61,117.36 ; 34,116.75 TP58.1@35,117.75 36,116.75 ; TP58.1@34.45,117.75 cw(c33.122,117.75) 34.061,116.811 cw(c35,115.872) 35,117.2 cw(c35,115.872) 35.939,116.811 cw(c36.878,117.75) TP58.1@35.55,117.75
  VCC w1: 70.5,192.5 v1(72.5,194.5) ; 70.499,196.5 v1(72.5,194.5) ; 70.5,194.5 v1(72.5,194.5)
  Bottom Layer w0.25: CC118.1@45.2,197.25 CC118.1@45.45,197
  Bottom Layer w0.5: v1@33.5,116.9 ccw(c33.5,118.469) TP58.1@34.61,117.36 ; v1@33.75,116.5 TP58.1@35,117.75 ; TP58.1@34.45,117.75 cw(c33.122,117.75) 34.061,116.811 cw(c35,115.872) 35,117.2 cw(c35,115.872) 35.939,116.811 cw(c36.878,117.75) TP58.1@35.55,117.75 ; TP58.1@34.5,117.75 TP58.1@35,117.75 ; TP58.1@35.384,117.366 cw(c34.019,116) pad.ICT@35.95,116 ; pad.ICT@36.5,116.25 TP58.1@35,117.75 ; v1(44,189.75) 44.45,189.75 CC120.1@45.2,190.5 ; v1@44,189.9 ccw(c44,191.349) CC120.1@45.024,190.324 ; v1(44,193.25) CC119.1@45.2,193.25 ; v1(44,197.25) 44.25,197 CC118.1@45.2,197 ; v1@44.106,197.356 ccw(c44.966,198.216) CC118.1@44.966,197 ; 44.568,202.75 ccw(c44.568,203.637) CC107.1@45.448,203.525 ; CC120.1@44.95,190.5 cw(c44.346,190.5) 44.773,190.073 cw(c45.2,189.646) CC120.1@45.2,190.25 ; CC107.1@44.952,203.588 cw(c44,203.71) v1(44,202.75) 45.2,202.75 ; CC119.1@45.023,193.073 ccw(c44.596,192.646) 44.596,193.25 ccw(c44.596,193.854) CC119.1@45.023,193.427 ; CC118.1@45.023,196.823 ccw(c44.596,196.396) 44.596,197 ccw(c44.596,197.604) CC118.1@45.023,197.177 ; CC117.1@45.023,202.177 ccw(c44.476,202.724) 45.25,202.724 ; CC107.1@45.038,203.338 cw(c44.526,202.826) 45.25,202.826 cw(c45.974,202.826) CC107.1@45.462,203.338 ; CC117.1@45.25,202.05 CC107.1@45.25,203.75 ; CC115.1@52,206.05 CC115.1@52,206.3 ; CC115.1@52.073,206.227 ccw(c51.646,206.654) 52.25,206.654 ccw(c52.854,206.654) CC115.1@52.427,206.227 ; CC115.1@52.25,206.3 v1(52.25,207.5) ; v1(55,179) 55,179.45 CC121.1@56,180.45 ; v1@55.15,179 cw(c56.599,179) CC121.1@55.574,180.024 ; CC121.1@55.75,180.45 cw(c55.146,180.45) 55.573,180.023 cw(c56,179.596) CC121.1@56,180.2 ; CC114.1@58.073,206.227 ccw(c57.646,206.654) 58.25,206.654 ccw(c58.854,206.654) CC114.1@58.427,206.227 ; CC114.1@58.25,206.3 v1(58.25,207.5) ; CC114.1@58.5,206.05 CC114.1@58.5,206.3 ; CC113.1@62.073,206.227 ccw(c61.646,206.654) 62.25,206.654 ccw(c62.854,206.654) CC113.1@62.427,206.227 ; CC113.1@62.25,206.05 62.25,207.25 v1(62.5,207.5) ; CC113.1@62.25,206.534 cw(c63.466,206.534) v1@62.606,207.394 ; CC112.1@65.573,206.227 ccw(c65.146,206.654) 65.75,206.654 ccw(c66.354,206.654) CC112.1@65.927,206.227 ; CC112.1@65.75,206.3 v1(65.75,207.5) ; CC112.1@66,206.05 CC112.1@66,206.3 ; v1(67.5,188.5) 69,190 70.5,190 71.05,189.45 CC122.1@71.05,188.75 72,188.75 v1(72.5,188.25) ; CC122.1@70.873,188.927 ccw(c70.446,189.354) 71.05,189.354 ccw(c71.654,189.354) 71.227,188.927 ccw(c71.654,189.354) 71.654,188.75 ccw(c71.654,188.146) CC122.1@71.227,188.573 ; 70.989,189.511 cw(c70.238,188.76) CC122.1@71.3,188.747 ; CC116.1@71.05,192.75 72,192.75 v1(72.5,192.25) ; CC110.1@71.05,196.75 v1(72.5,196.75) ; CC111.1@71.05,201 72.25,201 v1(72.5,200.75) ; CC116.1@71.227,192.573 cw(c71.654,192.146) 71.654,192.75 cw(c71.654,193.354) CC116.1@71.227,192.927 ; CC110.1@71.227,196.573 cw(c71.654,196.146) 71.654,196.75 cw(c71.654,197.354) CC110.1@71.227,196.927 ; CC111.1@71.227,200.823 cw(c71.654,200.396) 71.654,201 cw(c71.654,201.604) CC111.1@71.227,201.177 ; CC111.1@71.534,201 cw(c71.534,199.784) v1@72.394,200.644
  Bottom Layer w0.75: CC117.1@45.2,202 45.2,201.05 45.5,200.75 v1(48.75,200.75)
  Bottom Layer w1: CC120.1@45.2,190.5 45.2,192 ; 45.2,191.45 45.75,192 ; 45.2,192.5 45.7,192 45.75,192 ; 45.2,194.45 46,195.25 ; 45.2,196.05 46,195.25 ; CC118.1@45.2,197 45.2,195.25 ; v1(49.25,192) 45.75,192 ; v1(49.25,195.25) 46,195.25 ; 53.675,205.575 ccw(c52.488,204.388) CC115.1@52.25,206.05 53.2,206.05 53.75,205.5 v1(53.75,203.5) ; CC121.1@56,180.45 57.45,180.45 58.5,181.5 v1(58.5,182.5) ; v1(57.05,203.45) 57.05,205.8 57.3,206.05 CC114.1@58.25,206.05 ; CC114.1@58.5,206.05 CC113.1@62.25,206.05 ; CC309.2@62.75,188 62.75,187.829 63.75,186.829 LC1.1@63.75,186.016 ; CC309.2@63,188 v1(65,188) ; CC112.1@65.75,206.05 66,206.05 68.45,206.05 71.05,203.45 CC111.1@71.05,201 ; 67.75,206.05 68.75,205.05 v1(68.75,203.75) ; v1(69.75,204.75) v1(68.75,203.75) ; CC116.1@71.05,192.75 71.05,194.5 ; CC110.1@71.05,196.75 71.05,194.5 ; 71.05,202.75 70.05,203.75 v1(68.75,203.75) ; v1(72.5,194.5) 71.05,194.5 ; 45.2,192 CC119.1@45.2,193.25 45.2,195.25 ; 45.2,192 45.75,192 ; 45.2,195.25 46,195.25
  other v1: 33,112.75 33,113.75 33,114.75 31,115.25 32,115.25 32.75,115.75 33.5,115.75 38.5,116 39.5,116 32.75,116.75 33.5,116.75 37.5,116.75 38.5,116.75 39.5,116.75 28.5,136 29.25,136 30,136 30.75,136 28.5,136.75 29.25,136.75 30,136.75 30.75,136.75 64,188 48.25,192 48.25,195.25
V33A: CC158.2 CC159.2 CC303.2 CC304.1 CC305.2 CC354.1 CC436.2 DC12.2 DC13.2 DC14.2 DC15.2 DC16.2 DC17.2 DC18.2 DC19.2 DC20.2 DC21.2 DC22.2 DC23.2 DC24.2 DC27.2 DC28.2 DC29.2 DC54.2 DC55.2 DC56.2 DC59.2 DC60.2 DC61.2 DC62.2 DC63.2 DC64.2 DC65.2 DC66.2 DC67.2 DC68.2 DC69.2 DC70.2 LC2.2 pad.ICT@37.845,165.345 UC20.34 UC20.45 UC73.20 | length 139.4
  Top Layer w0.25: v1(44,187.75) 44.25,187.5 UC20.34@45.7,187.5 ; v1@47.306,182.306 cw(c46.836,181.836) 47.5,181.836 cw(c48.164,181.836) v1@47.694,182.306 ; UC20.45@47.5,180.7 v1(47.5,182.5) ; UC73.20@90.682,167.232 cw(c89.915,166.465) v1@91,166.465 ; v1@90.806,166.694 ccw(c90.336,167.164) 91,167.164 ccw(c91.664,167.164) v1@91.194,166.694 ; UC73.20@91,167.25 v1(91,166.5) 91,167 UC73.20@91.25,167.25
  Top Layer w0.5: v1(33.75,178.5) 34.655,177.595 34.905,177.595 DC17.2@35,177.595 ; v1(33.75,186.905) 33.75,188.5 34.095,188.845 DC20.2@35,188.845 ; 34.057,178.193 ccw(c35,179.135) DC17.2@35,177.802 ; DC27.2@34.853,181.448 ccw(c34.5,181.095) 34.5,181.595 ccw(c34.5,182.095) DC27.2@34.853,181.742 ; DC24.2@34.853,184.948 ccw(c34.5,184.595) 34.5,185.095 ccw(c34.5,185.595) DC24.2@34.853,185.242 ; DC20.2@34.853,188.698 ccw(c34.5,188.345) 34.5,188.845 ccw(c34.5,189.345) DC20.2@34.853,188.992 ; DC27.2@35,181.595 34.155,181.595 33.75,182 v1(33.75,183.405) 33.75,184.75 34.095,185.095 DC24.2@35,185.095 ; DC15.2@39.508,167.853 cw(c39.155,167.5) 39.655,167.5 cw(c40.155,167.5) DC15.2@39.802,167.853 ; v1(39.655,166.845) DC15.2@39.655,168 ; DC12.2@43.103,167.853 cw(c42.75,167.5) 43.25,167.5 cw(c43.75,167.5) DC12.2@43.397,167.853 ; v1(43.25,166.845) DC12.2@43.25,168 ; DC19.2@46.758,167.853 cw(c46.405,167.5) 46.905,167.5 cw(c47.405,167.5) DC19.2@47.052,167.853 ; v1(46.905,166.845) DC19.2@46.905,168 ; v1(48.595,166.845) 50.095,166.845 50.405,167.155 DC28.2@50.405,168 ; DC28.2@50.258,167.853 cw(c49.905,167.5) 50.405,167.5 cw(c50.905,167.5) DC28.2@50.552,167.853 ; v1(80,169.095) DC63.2@81.25,169.095 ; DC59.2@81.103,162.448 cw(c80.75,162.095) 81.25,162.095 cw(c81.75,162.095) DC59.2@81.397,162.448 ; DC63.2@81.103,168.948 ccw(c80.75,168.595) 80.75,169.095 ccw(c80.75,169.595) DC63.2@81.103,169.242 ; v1(81.25,161) DC59.2@81.25,162.595 ; DC64.2@81.25,165.845 82.155,165.845 v1(82.5,165.5) ; DC64.2@81.305,165.845 cw(c81.305,164.305) v1@82.394,165.394 ; DC64.2@81.397,165.698 cw(c81.75,165.345) 81.75,165.845 cw(c81.75,166.345) DC64.2@81.397,165.992 ; DC67.2@86.258,155.853 cw(c85.905,155.5) 86.405,155.5 cw(c86.905,155.5) DC67.2@86.552,155.853 ; v1(86.405,154.845) DC67.2@86.405,156 ; DC66.2@89.508,155.853 cw(c89.155,155.5) 89.655,155.5 cw(c90.155,155.5) DC66.2@89.802,155.853 ; v1(89.655,154.845) DC66.2@89.655,156 ; DC68.2@92.758,155.853 cw(c92.405,155.5) 92.905,155.5 cw(c93.405,155.5) DC68.2@93.052,155.853 ; v1(92.905,154.845) DC68.2@92.905,156 ; DC54.2@96.062,155.815 cw(c95.504,154.701) v1@96.75,154.701 ; DC54.2@96.098,156.057 cw(c94.886,154.845) v1@96.6,154.845 ; DC54.2@96.145,155.793 cw(c96.115,155.159) v1@96.75,155.159 ; DC54.2@96.155,155.793 cw(c96.155,155.293) 96.509,155.646 cw(c96.862,156) DC54.2@96.362,156 ; DC54.2@96.155,156 96.75,155.405 v1(96.75,154.845) ; DC54.2@96.286,156.262 cw(c95.91,155.511) 96.75,155.511
  VCC w1: v1(47.5,182.5) v1(48.25,182.5) 48.25,181.75 ccw(c47.392,181.75) v1@47.514,182.599 ; v1@47.545,182.589 cw(c46.96,181.439) 48.25,181.439
  Bottom Layer w0.5: v1(33.75,178.5) 34.655,179.405 DC16.2@35,179.405 ; v1(33.75,183.405) DC22.2@35,183.405 ; v1(33.75,186.905) DC23.2@35,186.905 ; v1(33.75,190.75) DC21.2@35,190.75 ; 34.057,178.807 cw(c35,177.865) DC16.2@35,179.198 ; 34.27,190.75 cw(c34.27,189.925) DC21.2@34.853,190.508 ; DC22.2@34.853,183.258 ccw(c34.5,182.905) 34.5,183.405 ccw(c34.5,183.905) DC22.2@34.853,183.552 ; DC23.2@34.853,186.758 ccw(c34.5,186.405) 34.5,186.905 ccw(c34.5,187.405) DC23.2@34.853,187.052 ; pad.ICT@37.633,165.557 ccw(c37.121,166.069) 37.845,166.069 ccw(c38.569,166.069) pad.ICT@38.057,165.557 ; DC18.2@37.698,167.853 cw(c37.345,167.5) 37.845,167.5 cw(c38.345,167.5) DC18.2@37.992,167.853 ; pad.ICT@37.845,165.345 v1(37.845,166.845) DC18.2@37.845,168 ; v1(39.655,166.845) 41.095,166.845 41.345,167.095 DC13.2@41.345,168 ; DC13.2@41.198,167.853 cw(c40.845,167.5) 41.345,167.5 cw(c41.845,167.5) DC13.2@41.492,167.853 ; v1(43.25,166.845) 44.595,166.845 45.095,167.345 DC14.2@45.095,168 ; v1(44,187.75) 44,187.2 CC158.2@45.2,186 45.2,185.8 CC159.2@46.8,184.2 ; v1@44.15,187.75 ccw(c45.84,187.75) 44.645,186.555 ; 44.923,167.173 ccw(c44.568,167.527) DC14.2@44.941,167.862 ; DC14.2@44.948,167.853 cw(c44.595,167.5) 45.095,167.5 cw(c45.595,167.5) DC14.2@45.242,167.853 ; CC158.2@44.95,186 ccw(c44.346,186) 44.773,186.427 ccw(c45.2,186.854) CC158.2@45.2,186.25 ; DC14.2@45.295,167.545 ccw(c44.961,167.88) DC14.2@45.313,168.196 ; CC158.2@45.45,186 ccw(c46.536,186) 45.768,185.232 ; 46.055,184.945 cw(c44.86,183.75) CC159.2@46.55,183.75 ; CC159.2@46.703,183.52 cw(c46.195,182.317) v1@47.5,182.317 ; CC159.2@46.897,183.98 cw(c46.513,183.071) 47.5,183.071 ; v1@47.378,182.828 cw(c47.608,182.21) v1@48.074,182.676 ; v1@47.394,182.606 ccw(c46.535,183.465) 47.75,183.465 ; v1@47.467,182.646 ccw(c47.387,183) 47.75,183 ; 47.5,183.75 v1(47.5,182.5) v1(48.25,182.5) ; 47.75,183.984 47.75,183 ; v1@48.25,182.743 cw(c49.707,182.743) CC305.2@48.677,183.773 ; CC305.2@48.25,183.7 v1(48.25,182.5) ; DC29.2@48.448,167.853 cw(c48.095,167.5) 48.595,167.5 cw(c49.095,167.5) DC29.2@48.742,167.853 ; v1(48.595,166.845) DC29.2@48.595,168 ; v1(80,169.095) 80,168 80.345,167.655 DC60.2@81.25,167.655 ; v1(80.095,170.905) DC62.2@81.25,170.905 ; DC60.2@81.103,167.508 ccw(c80.75,167.155) 80.75,167.655 ccw(c80.75,168.155) DC60.2@81.103,167.802 ; DC62.2@81.103,170.758 ccw(c80.75,170.405) 80.75,170.905 ccw(c80.75,171.405) DC62.2@81.103,171.052 ; DC61.2@81.25,164.612 ccw(c81.25,165.609) 81.955,164.904 ; DC61.2@81.456,164.405 82.5,165.449 v1(82.5,165.5) ; 82.208,165.157 ccw(c81.865,165.5) v1@82.35,165.5 ; DC65.2@84.448,155.853 cw(c84.095,155.5) 84.595,155.5 cw(c85.095,155.5) DC65.2@84.742,155.853 ; v1(84.595,154.845) DC65.2@84.595,156 ; v1(86.405,154.845) 87.345,154.845 87.845,155.345 DC69.2@87.845,156 ; 87.673,155.173 ccw(c87.318,155.527) DC69.2@87.691,155.862 ; DC69.2@87.698,155.853 cw(c87.345,155.5) 87.845,155.5 cw(c88.345,155.5) DC69.2@87.992,155.853 ; DC69.2@88.045,155.545 ccw(c87.711,155.88) DC69.2@88.063,156.196 ; v1(89.655,154.845) 90.845,154.845 91.095,155.095 DC70.2@91.095,156 ; DC70.2@90.948,155.853 cw(c90.595,155.5) 91.095,155.5 cw(c91.595,155.5) DC70.2@91.242,155.853 ; CC354.1@91.564,165.435 ccw(c90.523,166.75) CC436.2@92.2,166.75 ; CC354.1@91.75,165 91.75,165.25 92.2,165.7 CC436.2@92.2,166.75 ; CC354.1@91.874,165.043 ccw(c91.341,165.717) CC354.1@92.2,165.717 ; CC436.2@92.022,166.926 cw(c91,167.94) v1(91,166.5) 91.95,166.5 CC436.2@92.2,166.75 ; CC436.2@92.023,166.573 cw(c91.596,166.146) 92.2,166.146 cw(c92.804,166.146) CC436.2@92.377,166.573 ; v1(92.905,154.845) 93.595,154.845 94.345,155.595 DC55.2@94.345,156 ; 93.798,155.048 ccw(c92.964,155.881) DC55.2@94.139,155.982 ; v1(96.75,154.845) 97.345,154.845 97.595,155.095 DC56.2@97.595,156 ; DC56.2@97.448,155.853 cw(c97.095,155.5) 97.595,155.5 cw(c98.095,155.5) DC56.2@97.742,155.853 ; 47.75,183 v1(48.25,182.5)
  Bottom Layer w1: LC2.2@53.75,183.984 47.75,183.984 47.034,183.984 CC159.2@46.8,183.75 ; CC159.2@46.8,183.75 cw(c47.365,183.185) 47.365,183.984 ; CC159.2@46.8,183.75 cw(c47.365,183.185) 47.365,183.984 ; CC159.2@46.8,183.75 cw(c47.365,183.185) 47.365,183.984